# EAGLE board RJ11-ICSP-Breakout (EAGLE 7.5.0)
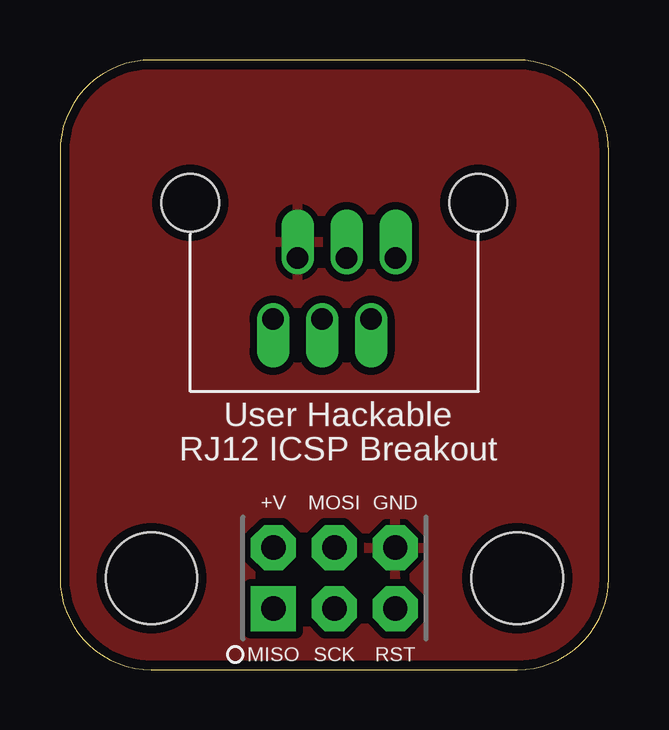
[diagram p0: board, top side]
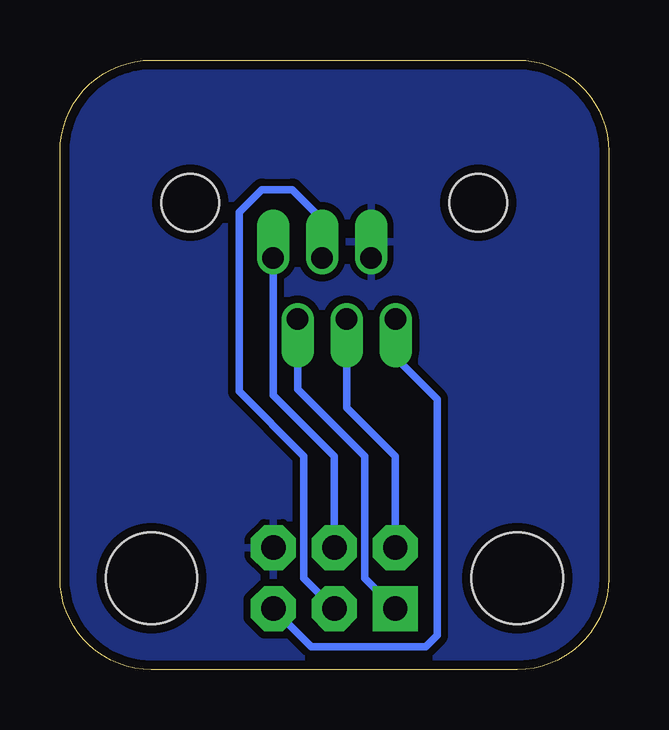
[diagram p1: board, bottom side, seen from below]

Size 22.86 x 25.4 mm. Coordinates in mm from the lower left corner, seen from the top.
Outline: 3.81,0 19.05,0 arc90 22.86,3.81 22.86,21.58 arc90 19.04,25.4 3.81,25.4 arc90 0,21.59 0,3.81 arc90 3.81,0
Copper layers (1*16): Top 0.0356mm / dielectric 1.5011mm / Bottom 0.0356mm
Design rules "LaenPCBOrder": minimum track width 6mil, minimum drill 13mil, track to track 6mil, track to pad 6mil, pad to pad 6mil, via to via 6mil, smd to smd 6mil, copper to edge 15mil, drill to drill 6mil, minimum pad ring 7mil, minimum via ring 7mil, stop-mask expansion 3mil, vias tented up to drill 0mil, thermal gap 10mil
Holes 3.81 mm at 3.81,3.81 19.05,3.81

## Footprints (pad centres in the part's own frame; a part is rotated, then mirrored left to right if it is on the bottom)
2X3-NS = drill 1.016 pad 1.88 square: 1 -2.54,-1.27 | drill 1.016 pad 1.88 octagon: 2 -2.54,1.27; 3 0,-1.27; 4 0,1.27; 5 2.54,-1.27; 6 2.54,1.27
RJ12 = drill 0.9 offset: 1 2.55,2.54; 2 1.53,0; 3 0.51,2.54; 4 -0.51,0; 5 -1.53,2.54; 6 -2.55,0 | hole 2.4: 6,-2.3; -6,-2.3

## Placement (x,y rotation side)
J5  ICSP  [2X3-NS]  11.43,3.81 0 top
U$7  RJ12  [RJ12]  11.43,17.14 180 top

## Library data of the parts
J5 U$7 = barbary_enterprises

## Nets
4: J5.3 U$7.4
5: J5.1 U$7.5
5V: J5.2 U$7.3
6: J5.4 U$7.6
GND: J5.6 U$7.2
RST: J5.5 U$7.1

## Tracks (layer width: path | path; a pad name or v marks a point on that pad's centre or on a via)
4
  Bottom 0.305: J5.3 12.7,3.81 12.7,8.89 15.4,11.59 15.4,19.05 14.45,20 13.18,20 11.91,18.73 11.91,17.18 U$7.4
5
  Bottom 0.305: J5.1 10.16,3.81 10.16,8.89 12.96,11.69 U$7.5
5V
  Bottom 0.305: J5.2 8.89,8.89 10.92,10.92 U$7.3
6
  Bottom 0.305: J5.4 11.43,8.89 13.98,11.44 U$7.6
GND
  pour Top (isolate 0.305): 19.04,25.4 3.82,25.4 arc90 0,21.58 0,3.86 arc90 3.86,0 19.05,0 arc90 22.86,3.81 22.86,21.58 arc90
  pour Bottom (isolate 0.305): 0,0 22.86,0 22.86,25.4 0,25.4
RST
  Bottom 0.305: J5.5 12.38,0.95 7.62,0.95 7.14,1.43 7.14,11.27 8.89,13.02 8.89,14.6 U$7.1

## Text on the board
tPlace: User Hackable | RJ12 ICSP Breakout